# Altium PCB PCB1.PcbDoc
Units mil, origin at the board's own origin, x right, y up, seen from the top; angles counter-clockwise.
Board outline 1062.99 x 1087 mil, 2 copper layers (Top Layer, Bottom Layer); 28 components, 29 nets, 126 pads, 47 vias.
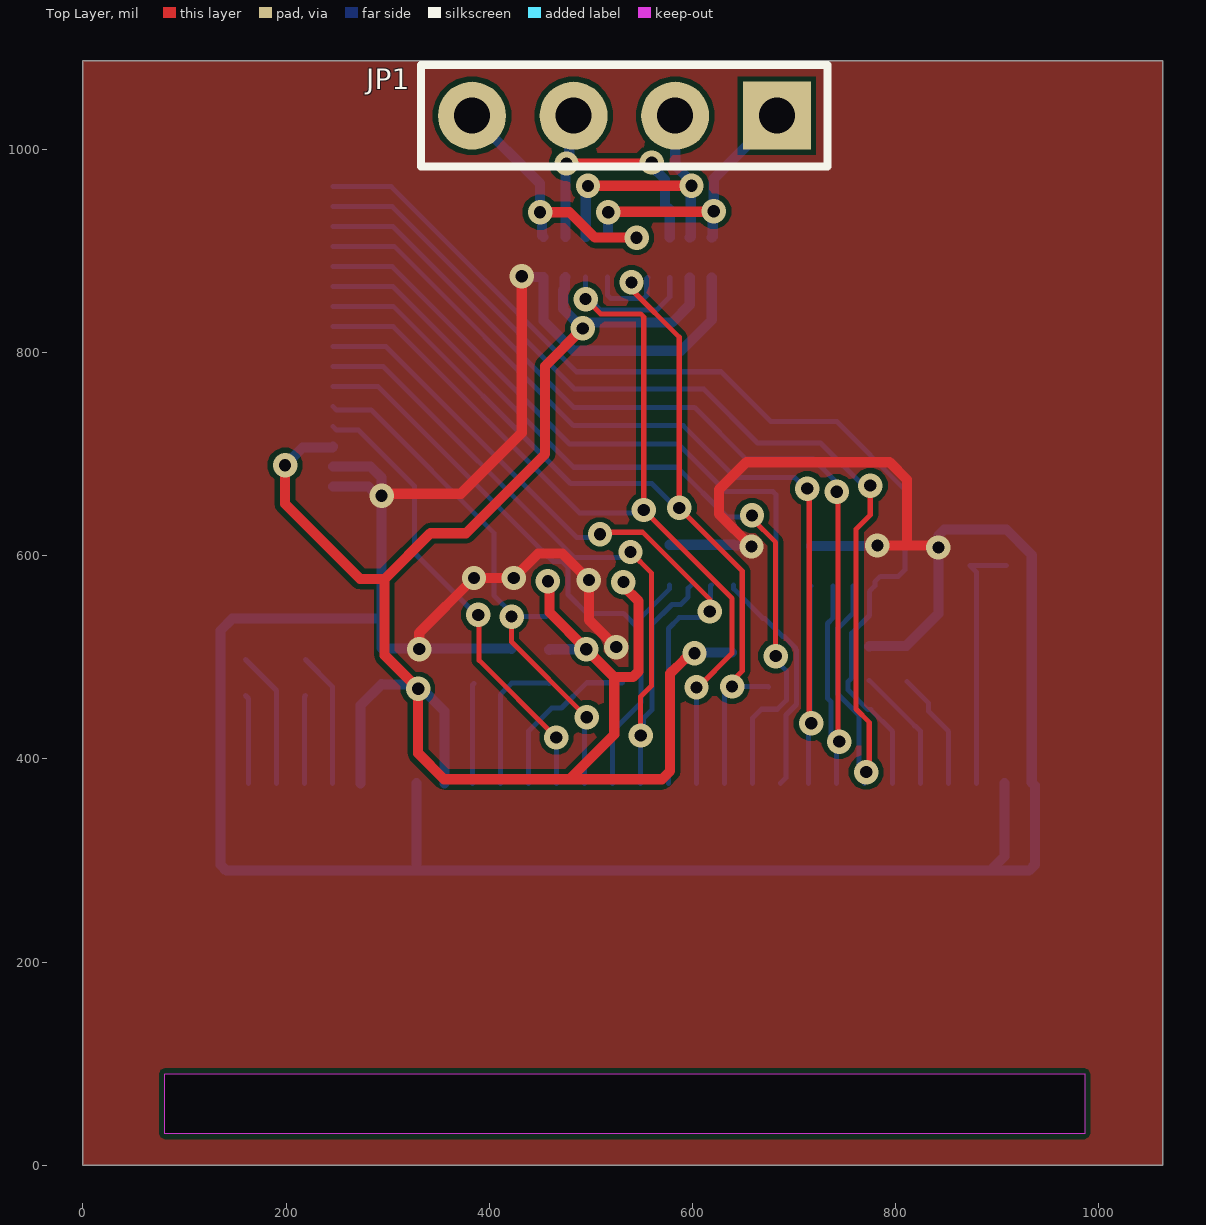
[diagram p0: Top Layer view]
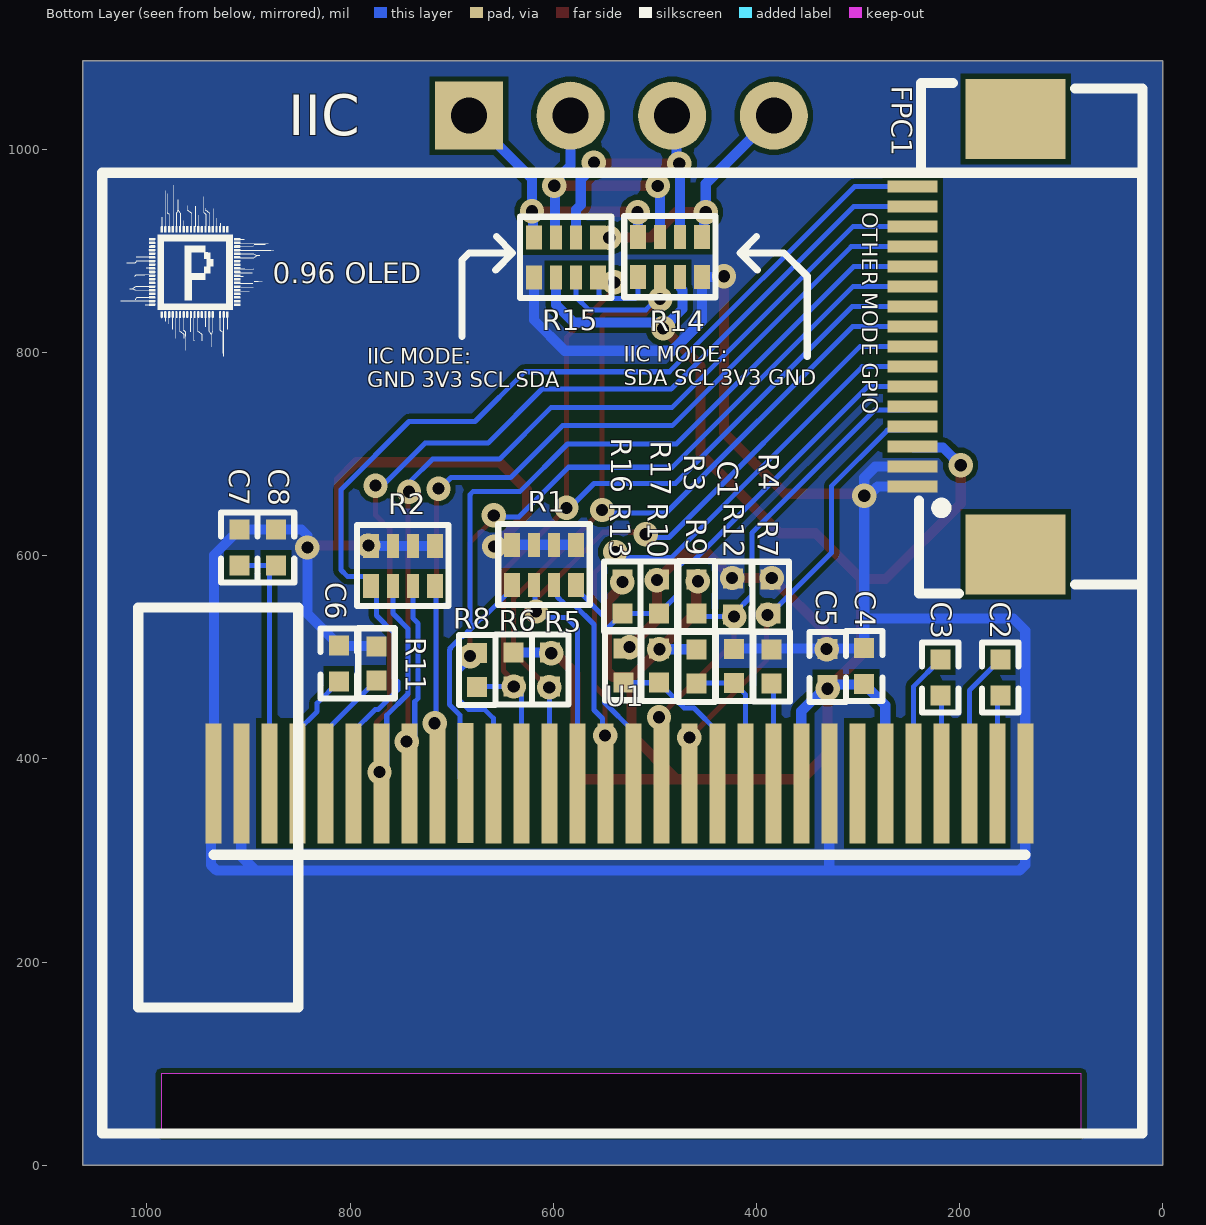
[diagram p1: Bottom Layer view, seen from below]

## Layer stack, top to bottom
Top Solder: solder mask 0.4, Solder Resist, Dk 3.5
Top Layer: signal copper 1.4
Dielectric 1: dielectric 12.6, FR-4, Dk 4.8
Bottom Layer: signal copper 1.4
Bottom Solder: solder mask 0.4, Solder Resist, Dk 3.5

## Board outline
0,0 0,1087 1062.99,1087 1062.99,0
cut-out: 80.41,31.2 80.41,90.3 985.91,90.3 985.91,31.2

## Design rules (kind name [scope] priority, off if disabled: settings)
Clearance [All] p1: gap=5 ignorepadtopadclearanceinfootprint=FALSE
PlaneClearance [All] p1: clearance=7
PlaneConnect [All] p1: planeconnectstyle=Direct reliefexpansion=20 reliefentries=4 reliefconductorwidth=10 reliefairgap=10
PolygonConnect [All] p1: connectstyle=Direct reliefconductorwidth=10 reliefentries=4 polygonreliefangle="90 Angle" airgapwidth=10
RoutingVias [All] p1: holewidth=12 width=24 viastyle="Through Hole" minholewidth=12 minwidth=24 maxholewidth=12 maxwidth=24
SolderMaskExpansion [All] p1: expansion=4 istentingtop=FALSE
Width power [InNetClass('power')] p1: maxlimit=12 minlimit=10 preferedwidth=10 minimp=50.000000 maximp=50.000000 favimp=50.000000
Width [All] p2: maxlimit=12 minlimit=5 preferedwidth=5 minimp=50.000000 maximp=50.000000 favimp=50.000000
28 further rules are at their usual default settings.

## Classes and differential pairs
net class power: 3V3 GND

## Components (designator, comment, footprint, x,y, rotation, side; value= is the part's Value field where it differs from the comment)
C1 "100nf/NC" C0402_L 423,560 r270 bottom
C2 "1uf" C0402_L 160,480 r270 bottom
C3 "1uf" C0402_L 219,480 r270 bottom
C4 "10uf" C0402_L 294,491.28 r270 bottom
C5 "100nf" C0402_L 330,490.45 r270 bottom
C6 "4.7uf" C0402_L 811,494 r270 bottom
C7 "10uf" C0402_L 909,608 r270 bottom
C8 "100nf" C0402_L 873,608 r270 bottom
FPC1 "FPC连接器 16PIN  0.5MM" FPC-SMD_FPC-0.5MM-16P 143,814 r90 bottom
JP1 "HDR-1X4" HDR2.54-LI-4P 533,1033 r180 top
R1 "0R/NC" RCA-8P4R-0402 609,591 r0 bottom
R2 "0R/NC" RCA-8P4R-0402 748,590 r0 bottom
R3 "5.1K/NC" R0402_L 459,560 r270 bottom
R4 "0R/NC" R0402_L 386,559.73 r90 bottom
R5 "5.1K/NC" R0402_L 603,488 r90 bottom
R6 "5.1K/NC" R0402_L 639,488 r90 bottom
R7 "NC/0R" R0402_L 385,491 r90 bottom
R8 "0R/NC" R0402_L 675,487.32 r270 bottom
R9 "0R/NC" R0402_L 459,490.73 r90 bottom
R10 "NC/0R" R0402_L 496,491.68 r90 bottom
R11 "1M/760K" R0402_L 774,494 r270 bottom
R12 "NC/0R" R0402_L 422,491.27 r270 bottom
R13 "0R/NC" R0402_L 531,492 r270 bottom
R14 "NC/0R" RCA-8P4R-0402 485,894 r0 bottom
R15 "0R/NC" RCA-8P4R-0402 587.5,893.31 r0 bottom
R16 "NC/4.7K" R0402_L 532,560 r90 bottom
R17 "NC/4.7K" R0402_L 496,560 r90 bottom
U1 "SSD1306" 1.3OLED-2 550.01,406 r0 bottom

## Footprints (in the part's own frame and the unit in brackets; to place one, negate y for a bottom-side part, rotate by r counter-clockwise, add the part's x,y. Pads: shape width x height; smd on the part's side, far side on the other; paste and mask are expansions set on the pad)
1.3OLED-2 [mm]
  rect 0.4x3 smd paste+0 mask+0.051: 1(-10.531,0.762) 2(-9.831,0.763) 3(-9.131,0.762) 4(-8.431,0.762) 5(-7.731,0.762) 6(-7.031,0.762) 7(-6.331,0.762) 8(-5.631,0.762) 9(-4.931,0.762) 10(-4.231,0.762) 11(-3.531,0.762) 12(-2.831,0.762) 13(-2.131,0.762) 14(-1.431,0.762) 15(-0.731,0.762) 16(-0.031,0.762) 17(0.669,0.762) 18(1.369,0.762) 19(2.069,0.763) 20(2.769,0.762) 21(3.469,0.761) 22(4.169,0.762) 23(4.869,0.762) 24(5.569,0.762) 25(6.269,0.763) 26(6.969,0.762) 27(7.669,0.763) 28(8.369,0.762) 29(9.069,0.762) 30(9.769,0.762)
  silkscreen extent -10.54,2.55 9.76,2.55
C0402_L [mm]
  rect 0.5x0.5 smd: 1(-0.45,0) 2(0.45,0)
  silkscreen extent -0.87,-0.46 0.88,0.46, body extent -0.5,-0.25 0.5,0.25, height 0.5
FPC-SMD_FPC-0.5MM-16P [mm]
  rect 0.3x1.25 smd paste+0 mask+0.05: 1(-3.71,2.624) 2(-3.21,2.624) 3(-2.71,2.624) 4(-2.21,2.624) 5(-1.71,2.624) 6(-1.21,2.624) 7(-0.71,2.624) 8(-0.21,2.624) 9(0.29,2.624) 10(0.79,2.624) 11(1.29,2.624) 12(1.79,2.624) 13(2.29,2.624) 14(2.79,2.624) 15(3.29,2.624) 16(3.79,2.624)
  rect 2x2.5 smd paste+0 mask+0.05: 17(5.48,0.049) 18(-5.4,0.049)
  silkscreen extent -6.38,-3.12 6.38,2.47
HDR2.54-LI-4P [mm]
  rect 1.7x1.7 hole 0.9: 1(-3.81,0)
  round 1.7 hole 0.9: 2(-1.27,0) 3(1.27,0) 4(3.81,0)
  silkscreen extent -5.08,-1.27 5.08,1.27, body extent -5.08,-1.27 5.08,1.27, height 2.54
R0402_L [mm]
  rect 0.5x0.5 smd: 1(-0.425,0) 2(0.425,0)
  silkscreen extent -0.88,-0.46 0.87,0.46, body extent -0.5,-0.25 0.5,0.25, height 0.3
RCA-8P4R-0402 [mm]
  rect 0.4x0.6 smd: 1(-0.8,-0.5) 4(0.8,-0.5) 5(0.8,0.5) 8(-0.8,0.5)
  rect 0.3x0.6 smd: 2(-0.25,-0.5) 3(0.25,-0.5) 6(0.25,0.5) 7(-0.25,0.5)
  silkscreen extent -1.14,-1.02 1.15,1.01, body extent -1,-0.5 1,0.5, height 0.45

## Part data
C1 C2 C3 C4 C5 C6 C7 C8: library part C, "贴片电容/MLCC电容"
JP1: library part "Header 4", "4P接插件"
R1 R2 R15: library part R-8P4R, "贴片4P排阻"
R3 R4 R5 R6 R7 R8 R9 R10 R11 R12 R13 R14 R16 R17: library part R, "贴片电阻"

## Via types
v1: diameter 24, hole 12, Top Layer to Bottom Layer, tented both sides, 47 vias

## Nets (pads, with @x,y where several pads share a name; then routed paths per layer and width w, separated by ;. In a path a pad name is that pad's centre, name@x,y a point inside that pad or via, vN(x,y) a via of type N, cw(c..) or ccw(c..) an arc to the next point about the centre after c; other vN are vias at no path point)
3V3: C4.2 C5.2 FPC1.3 R3.1 R5.2 R6.2 R9.2 R10.2 R14.7 R15.6 R16.2 U1.6 U1.9 | length 2038.7
  Top Layer w10: v1(199,689) 199,651 273,577 297,577 ; v1(457.71,574.91) 459.25,573.37 459.25,544.21 v1(495.53,507.94) 523,480.46 ; v1(491.93,823.69) 455,786.77 455,700 377,622 342,622 297,577 ; v1(532,574) 532,570.21 547,555.21 547,486.32 541.14,480.46 523,480.46 ; v1(602,504) 598.21,504 584.21,490 583.86,490 578,484.14 578,388 570,380 479,380 ; 297,577 297,502 v1(330,469) 330,405.47 355.47,380 479,380 ; 479,380 523,424 523,480.46
  Bottom Layer w10: v1(199,689) 216.4,706.4 245.4,706.4 FPC1.3 ; U1.6 273.2,452.77 C4.2 294.42,473.15 329.58,473.15 C5.2 355.88,446.85 U1.9 ; v1(457.71,574.91) 459,576.2 R3.1 ; R9.2 459.47,507.94 v1(495.53,507.94) R10.2 ; R14.7 474.25,873.41 474.25,863.07 472.84,861.66 472.84,842.79 487.36,828.27 491.29,828.27 v1@492.52,829.5 ; v1(491.93,823.69) 492.52,824.28 v1@492.52,829.5 ; v1(532,574) R16.2 ; R15.6 597.34,846.86 579.98,829.5 v1@492.52,829.5 ; v1(602,504) 602.73,504.73 R5.2 R6.2
BS1: R9.1 R12.2 U1.11 | length 140.3
  Bottom Layer w5: U1.11 411,463.54 R12.2 458.46,474.54 R9.1
BS2: R10.1 R13.2 U1.12 | length 163.5
  Bottom Layer w5: U1.12 438.56,427.18 461.46,450.08 471.13,450.08 R10.1 530.68,474.95 R13.2
CS: FPC1.4 R4.1 U1.13 | length 456.6
  Top Layer w5: v1(389.04,541.68) 389.37,542 390,542 390,497 v1(466,421)
  Bottom Layer w5: FPC1.4 249.71,723.59 271.15,723.59 273.14,721.59 326.34,668.39 326.34,602.66 R4.1 387.32,541.68 v1(389.04,541.68) ; v1(466,421) 466.12,420.88 U1.13
D0/SCL: FPC1.9 R5.1 R14.6 R15.7 U1.18 | length 1090.1
  Top Layer w5: v1(494.84,852.55) 509.39,838 549,838 552,835 v1(552,645) 639,558 639,504 605.36,470.36 v1(603.91,470.36)
  Bottom Layer w5: FPC1.9 305.58,825.42 489,642 549,642 v1(552,645) ; R14.6 494.84,856.16 509,842 565,842 577.65,854.65 R15.7 ; R5.1 v1(603.91,470.36) U1.18
D1/SDA: FPC1.10 R6.1 R8.2 R14.5 R15.8 U1.19 | length 1081.7
  Top Layer w5: v1(540,869) 540,862 587,815 v1(587,647) 649,585 649,486.41 639,476.41 v1(639,471.27)
  Bottom Layer w5: FPC1.10 305.9,845.1 480,671 560,671 584,647 v1(587,647) ; R14.5 516.5,856.01 519.43,853.08 552.07,853.08 555,856.01 555,872.63 R15.8 ; U1.19 631.47,463.74 v1(639,471.27) 674.32,471.27 R8.2
D2/SDA: FPC1.11 R8.1 U1.20 | length 813.2
  Top Layer w5: v1(658.6,639.6) 658.6,636.4 681.89,613.11 v1(681.89,501.14)
  Bottom Layer w5: FPC1.11 305.21,864.79 483,687 585,687 634,638 657,638 v1(658.6,639.6) ; U1.20 659.03,440.03 667.84,448.84 683.54,448.84 692.34,457.64 692.34,486.71 R8.1
D3: FPC1.12 R1.5 U1.21 | length 891.1
  Bottom Layer w5: FPC1.12 304.53,884.47 479,710 586,710 633,663 679.15,663 682.08,660.07 682.08,527.27 ; R1.5 640.5,567.38 669,538.87 669,538 671.35,538 682.08,527.27 ; U1.21 691.96,381.41 691.96,443.12 702.34,453.5 702.34,507 701.39,507.96 701.39,509.22 700.5,510.11 689.97,520.64 688.7,520.64 682.08,527.27
D4: FPC1.13 R2.8 U1.22 | length 994.3
  Top Layer w5: v1(713,666) 714.92,664.08 714.92,436.92 v1(716.84,435)
  Bottom Layer w5: FPC1.13 306.84,904.16 483,728 591,728 642,677 700.57,677 711.57,666 v1(713,666) ; U1.22 714.15,432.31 v1(716.84,435) ; R2.8 715.52,569.33 715.52,436.48 v1@716.94,435.06
D5: FPC1.14 R2.7 U1.23 | length 1060.5
  Top Layer w5: v1(742,663) 743.2,661.8 743.2,418.2 v1(744.4,417)
  Bottom Layer w5: FPC1.14 305.16,923.84 483,746 602,746 653,695 719,695 740.36,673.64 740.36,664.64 v1(742,663) ; R2.7 738.16,538.5 733,533.34 733,459.69 736.34,456.36 736.34,419.08 U1.23@741.71,413.71 ; U1.23 U1.23@741.71,413.71 ; v1(744.4,417) 744.4,416.4 U1.23@741.71,413.71
D6: FPC1.15 R2.6 U1.24 | length 1149.4
  Top Layer w5: v1(771,387) 771,389 774,392 774,436 761,449 761,626 775,640 v1(775,669)
  Bottom Layer w5: FPC1.15 304.47,943.53 484,764 611.07,764 664.07,711 726,711 769.43,667.57 773.57,667.57 v1(775,669) ; R2.6 757.84,542.98 743,528.13 743,463.83 763.9,442.94 763.9,381.37 U1.24
D7: FPC1.16 R2.5 U1.25 | length 1028.8
  Bottom Layer w5: FPC1.16 303.62,963.21 485.83,781 628,781 677,732 742,732 809,665 809,585.93 802.7,579.63 784.87,579.63 779.5,574.25 R2.5 774.12,564.94 774.12,541.15 756.66,523.68 756.66,479.66 753,476 753,467.98 772.56,448.42 775.55,448.42 796.83,427.14 U1.25
DC: FPC1.6 R1.8 R16.1 R17.1 U1.15 | length 637.1
  Bottom Layer w5: FPC1.6 290.64,766.36 462.93,594.07 471.95,594.07 477.5,588.52 477.5,561.77 R17.1 R16.1 548.34,526.93 549.5,525.77 ; U1.15 521.23,427.18 549.5,455.45 549.5,525.77 ; R1.8 577.5,567.38 549.5,539.37 549.5,525.77
GND: C1.1 C4.1 C5.1 C6.1 C7.1 C8.1 FPC1.1 FPC1.2 R1.1 R1.2 R1.3 R1.4 R2.1 R2.2 R2.3 R2.4 R4.2 R7.2 R11.1 R12.1 R13.1 R14.8 R15.5 R17.2 U1.1 U1.8 U1.29 U1.30 | length 3822.1
  Top Layer w10: v1(294,659) 296,661 372,661 432,721 v1(432,875) ; v1(331,508) 331,524 v1(385,578) v1(424,578) 448,602 472,602 v1(498,576) 498,537 v1(525,510) ; v1(658.07,609.02) 626,641.09 626,665 653,692 794,692 811,675 811,610 ; v1(782,610) 811,610 ; v1(842,608) 840,610 811,610
  Bottom Layer w10: FPC1.1 281.06,667.94 v1@294,655 ; FPC1.2 283.14,687.62 294,676.77 v1(294,659) v1@294,655 ; U1.8 328.32,291.32 327,290 ; v1(385,578) 386,577 R4.2 ; R12.1 421.42,508.58 294.42,508.58 C4.1 294,538 ; C1.1 423.72,577.72 v1(424,578) ; v1(432,875) 432.68,874.32 R14.8 453.5,831.01 482.82,801.69 588.69,801.69 618.99,831.99 R15.5 ; v1(525,510) 529.73,510 R13.1 ; R1.1 R1.2 R1.3 R1.4 641.33,609.85 657.24,609.85 v1(658.07,609.02) ; R2.1 R2.2 R2.3 R2.4 781.69,609.69 v1(782,610) ; R11.1 774.49,511.22 810.51,511.22 C6.1 842,542.72 v1(842,608) 842,619.86 847.86,625.72 C8.1 C7.1 934,600.72 934,376.62 U1.30 937,373.62 937,295.86 931.14,290 893,290 ; U1.29 907.06,304.06 893,290 ; 294,538 v1@294,655 ; 294,538 147,538 135.41,526.41 U1.1 135.41,295.86 141.27,290 327,290 ; 327,290 893,290
NetC2_1: C2.1 U1.3 | length 134.4
  Bottom Layer w5: C2.1 190.53,467.19 U1.3
NetC2_2: C2.2 U1.2 | length 87.6
  Bottom Layer w5: C2.2 162.97,459.31 U1.2
NetC3_1: C3.1 U1.5 | length 132.8
  Bottom Layer w5: C3.1 245.65,471.07 U1.5
NetC3_2: C3.2 U1.4 | length 86.7
  Bottom Layer w5: U1.4 218.09,461.37 C3.2
NetC6_2: C6.2 U1.27 | length 117.3
  Bottom Layer w5: C6.2 832.45,454.83 832.45,446.63 851.94,427.14 U1.27
NetC7_2: C7.2 C8.2 U1.28 | length 253
  Bottom Layer w5: U1.28 879.5,583.78 C8.2 C7.2
NetJP1_1: JP1.1 R14.4 R15.4 | length 275.5
  Top Layer w10: v1(517,938) 517.5,938.5 620.5,938.5 v1(621,939)
  Bottom Layer w10: R14.4 516.75,913.94 516.75,937.75 v1(517,938) ; R15.4 620,914 620,938 v1(621,939) 621,971 JP1.1
NetJP1_2: JP1.2 R14.3 R15.3 | length 280.7
  Top Layer w10: v1(497.16,964) 497.25,964.1 598.9,964.1 v1(599,964.19)
  Bottom Layer w10: R14.3 495,913.84 495,961.84 v1(497.16,964) ; JP1.2 583,983.98 599,967.98 v1(599,964.19) ; R15.3 598.24,913.91 598.24,962.97 v1@599.47,964.19
NetJP1_3: JP1.3 R14.2 R15.2 | length 288.3
  Top Layer w10: v1(476,986) 559,986 v1(560,987)
  Bottom Layer w10: R14.2 475.16,985.16 v1(476,986) 478.68,988.68 478.68,1028.68 JP1.3 ; v1(560,987) 560,983.21 573,970.21 573,945.23 577.65,940.58 R15.2
NetJP1_4: JP1.4 R14.1 R15.1 | length 253.9
  Top Layer w10: v1(450,938) 479,938 504,913 v1(545,913)
  Bottom Layer w10: JP1.4 450,966 v1(450,938) 451.75,936.25 451.75,915.44 R14.1
NetR7_1: R7.1 U1.10 | length 98.9
  Bottom Layer w5: U1.10 383.44,472.71 R7.1
NetR11_2: R11.2 U1.26 | length 122.3
  Bottom Layer w5: R11.2 818.71,432.56 819.01,432.56 824.38,427.18 U1.26
RD: FPC1.8 R1.6 U1.17 | length 715.7
  Top Layer w5: v1(509,621) 511.07,623.07 550.93,623.07 617,557 v1(617,545)
  Bottom Layer w5: FPC1.8 298.27,805.73 486,618 506.07,618 509,620.93 v1(509,621) ; U1.17 576.35,528.35 587,539 605.86,539 613.09,546.23 v1@615.23,546.23 ; v1(617,545) 617.92,545.92 617.92,570.39 R1.6
RST: C1.2 FPC1.5 R3.2 U1.14 | length 533.3
  Top Layer w5: v1(422,540) 422,515 v1(496,441)
  Bottom Layer w5: FPC1.5 249.71,743.27 283.73,743.27 404.5,622.5 404.5,560.78 422,543.28 v1(422,540) 455.73,540 R3.2 ; U1.14 493.68,438.68 v1(496,441)
RW: FPC1.7 R1.7 U1.16 | length 787.5
  Top Layer w5: v1(539,603.57) 559.5,583.07 559.5,471.82 549,461.32 v1(549,423)
  Bottom Layer w5: FPC1.7 295.95,786.05 484,598 529.07,598 532.07,601 536.43,601 v1(539,603.57) ; U1.16 548.79,423 551.63,425.84 551.63,439.63 560,448 560,532.16 579.85,552 588.48,552 591.12,554.64 595.75,559.27 595.75,567.91 R1.7
pads on no net: FPC1.17 FPC1.18 U1.7

## Polygon pours and split planes (outlines as drawn)
GND on Top Layer "GND_L01_P000" (solid, remove dead copper, pour order 0): 1063,1087 0,1087 0,0 1063,0
GND on Bottom Layer "GND_L02_P001" (solid, remove dead copper, pour order 1): 1063,1087 0,1087 0,0 1063,0

## Silkscreen, mask and mechanical layers (free items; w line width, h text height)
Bottom Overlay:
  drawing of 103 lines, arcs and shapes, not listed
  text "IIC" at 861,1014 h40
  text "OTHER MODE GPIO" at 296,938 h15 r90
  text "0.96 OLED" at 876,868 h20
  text "IIC MODE:" at 530.56,790.84 h15
  text "IIC MODE:" at 783,789 h15
  text "SDA SCL 3V3 GND" at 530.56,767.84 h15
  text "GND 3V3 SCL SDA" at 783,766 h15
Mechanical 1:
  lines w10: 0,0 1062.99,0 1062.99,1087 0,1087 0,0 ; 80.41,31.2 985.91,31.2 985.91,90.3 80.41,90.3 80.41,31.2